# Altium PCB PCB.PcbDoc
Units mm, origin at the board's own origin, x right, y up, seen from the top; angles counter-clockwise.
Board outline 36 x 24 mm, 2 copper layers (Top, Bottom), stack 1.062 mm thick; 43 components, 32 nets, 168 pads, 73 vias.
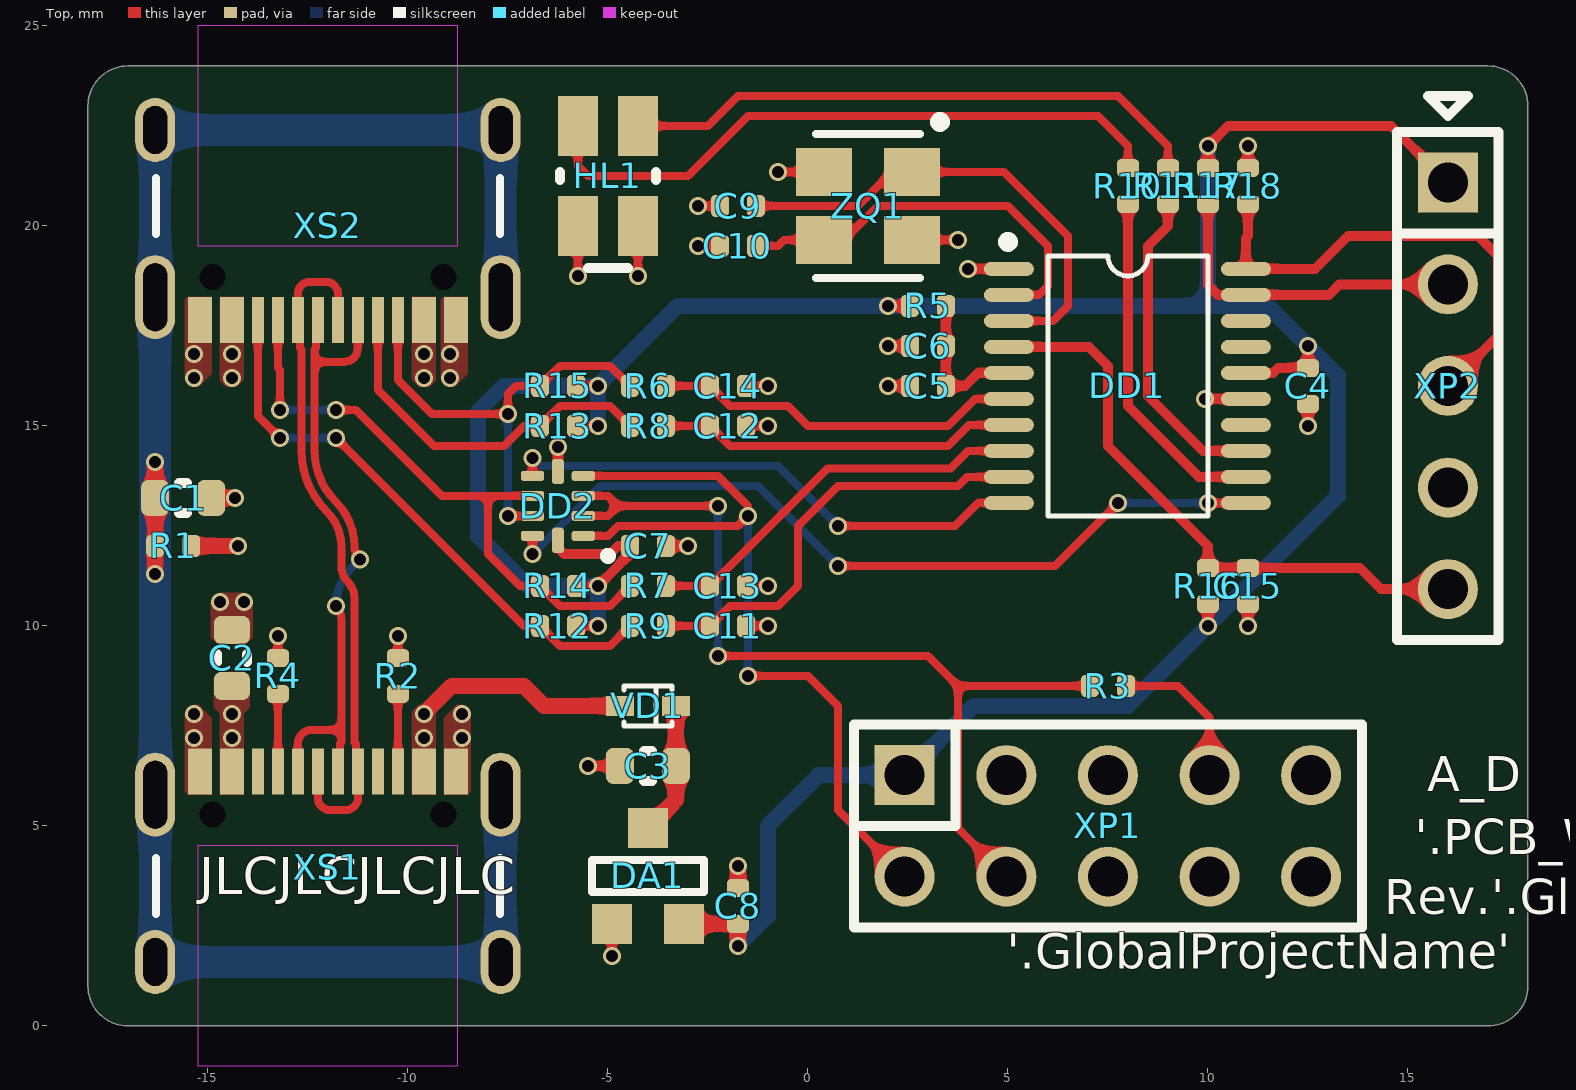
[diagram p0: Top view]
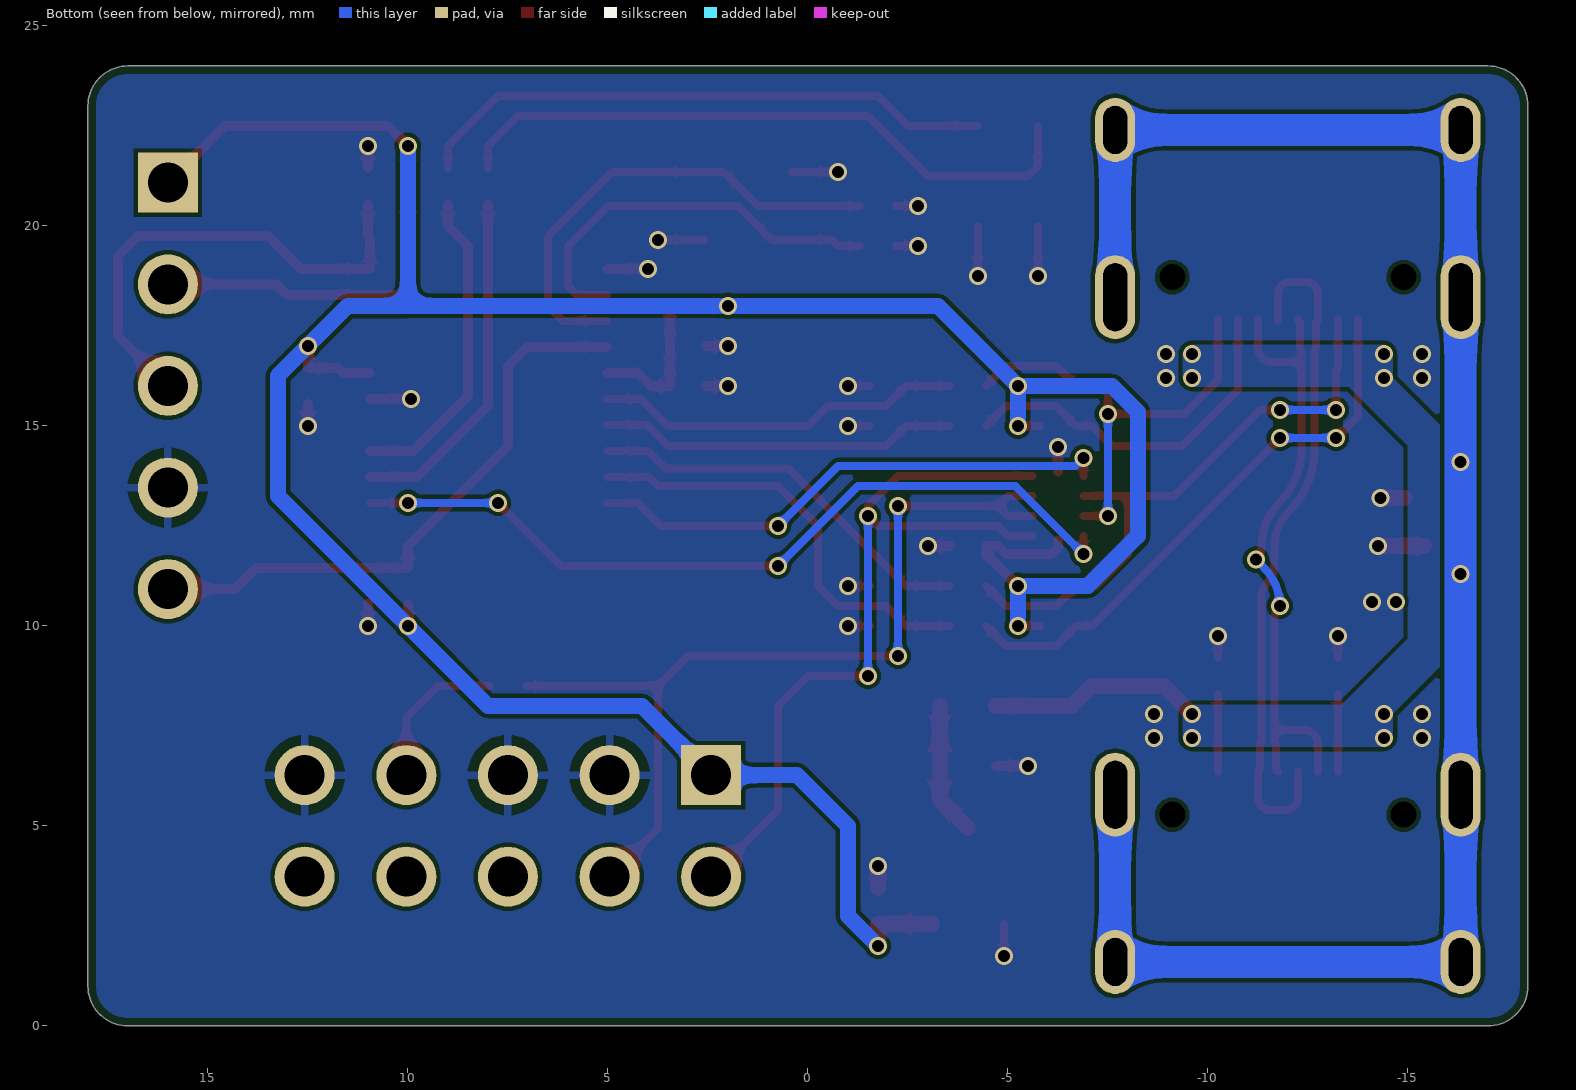
[diagram p1: Bottom view, seen from below]
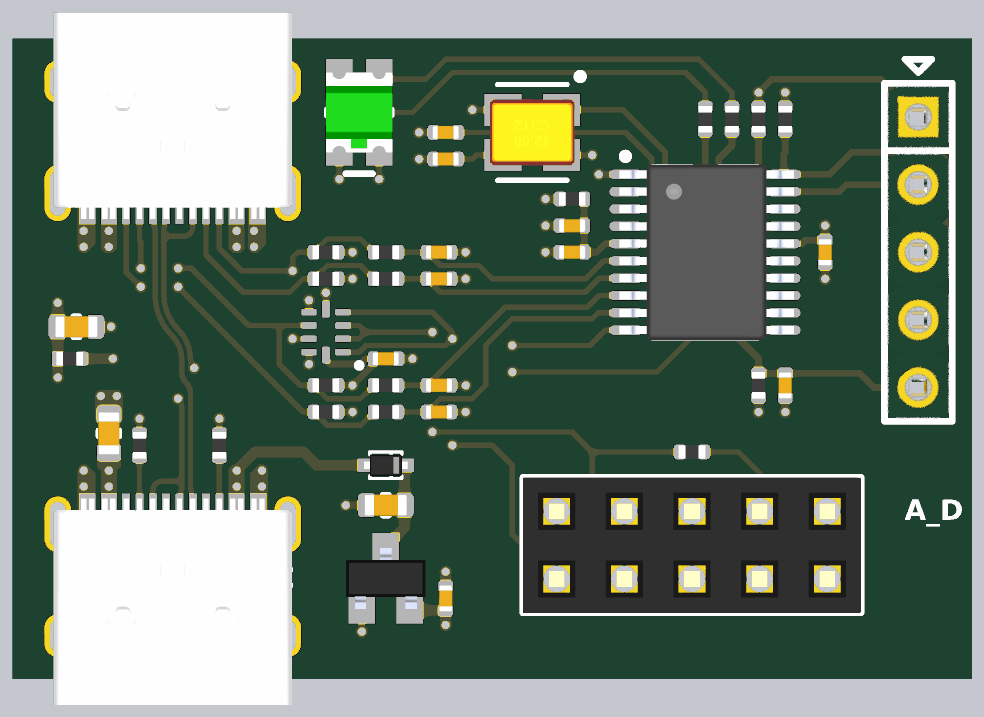
[diagram p2: 3D render of the assembled board from above, using the file's embedded part models]

## Layer stack, top to bottom
Top Solder: solder mask 0.0102, Solder Resist, Dk 3.5
Top: signal copper 0.0356
Core 1: core 0.9906, Core-042, Dk 4.6
Bottom: signal copper 0.0356
Bottom Solder: solder mask 0.0102, Solder Resist, Dk 3.5

## Board outline
-18,1 -18,23 cw(c-17,23) -17,24 17,24 cw(c17,23) 18,23 18,1 cw(c17,1) 17,0 -17,0 cw(c-17,1)

## Design rules (kind name [scope] priority, off if disabled: settings)
AssemblyTestPointUsage [All] p1 off:
AssemblyTestpoint [All] p1 off: testpointundercomponent=TRUE minsize=1.016 maxsize=2.54 preferedsize=1.524 minholesize=0 maxholesize=1.016 preferedholesize=0.813 testpointgrid=0.025 usegrid=TRUE gridtolerance=0 allowsidetop=TRUE allowsidebottom=TRUE
BoardOutlineClearance [All] p1: gap=0.2 ignorepadtopadclearanceinfootprint=FALSE
Clearance [All] p1: gap=0.1 ignorepadtopadclearanceinfootprint=FALSE
ComponentClearance [All] p1 off: gap=0.25 collisioncheckmode=3 verticalgap=0.25 showdistances=FALSE
DiffPairsRouting [All] p1: maxlimit=0.127 minlimit=0.127 mostfreqgap=0.127 toplayer_minwidth=0.2 toplayer_maxwidth=0.2 toplayer_prefwidth=0.2 bottomlayer_minwidth=0.2 bottomlayer_maxwidth=0.2 bottomlayer_prefwidth=0.2 impedanceprofiledriven=TRUE impedanceprofileid={B07E80A7-A74E-45DB-9064-49542DDC2D8E} impedanceprofilevalue=90.000000 maxuncoupledlength=12
FabricationTestPointUsage [All] p1 off: valid=0 allowmultiple=FALSE
FabricationTestpoint [All] p1 off: side=3 testpointundercomponent=TRUE minsize=1.016 maxsize=2.54 preferedsize=1.524 minholesize=0 maxholesize=1.016 preferedholesize=0.813 testpointgrid=0.025 allowsidetop=TRUE allowsidebottom=TRUE usegrid=TRUE gridtolerance=0
Height [All] p1: minheight=0 maxheight=25 prefheight=25
HoleSize [All] p1: absolutevalues=TRUE maxlimit=6 minlimit=0.2 maxpercent=80.000 minpercent=20.000
HoleToHoleClearance [All] p1: gap=0.25 allowstackedmicrovias=TRUE
MinimumSolderMaskSliver [All] p1 off: minsoldermaskwidth=0.254
PlaneClearance [All] p1: clearance=0.125
PlaneConnect [All] p1: planeconnectstyle=Direct reliefexpansion=0.4 reliefentries=4 reliefconductorwidth=0.3 reliefairgap=0.2
PolygonConnect PolygonConnect_DirectConnect [InComponentClass('DC')] p1: connectstyle=Direct reliefconductorwidth=0.254 reliefentries=4 polygonreliefangle="90 Angle" airgapwidth=0.254
PolygonConnect [All] p2: thpad.connectstyle=Relief thpad.reliefconductorwidth=0.2 thpad.reliefentries=4 thpad.polygonreliefangle="90 Angle" thpad.airgapwidth=0.25 smdpad.connectstyle=Relief smdpad.reliefconductorwidth=0.15 smdpad.reliefentries=4 smdpad.polygonreliefangle="90 Angle" smdpad.airgapwidth=0.15 via.connectstyle=Direct via.reliefconductorwidth=0.254 via.reliefentries=4 via.polygonreliefangle="90 Angle" via.airgapwidth=0.254
RoutingCorners [All] p1: cornerstyle=45-Degree minsetback=1.5 maxsetback=3.5
RoutingVias [All] p1: holewidth=0.2 width=0.4 viastyle="Through Hole" minholewidth=0.2 minwidth=0.4 maxholewidth=1 maxwidth=2
SMDEntry [All] p1: side=TRUE corner=TRUE anyangle=TRUE
SilkToSilkClearance [All] p1 off: silktosilkclearance=0.254
SilkToSolderMaskClearance [IsPad] p1 off: minsilkscreentomaskgap=0.254 clearancetoexposedcopper=TRUE
SolderMaskExpansion [All] p1: expansion=0.025 istentingtop=FALSE
Width [All] p1: maxlimit=8 minlimit=0.15 preferedwidth=0.6
Width Width_TrackEnds [All] p2 off: maxlimit=0.25 minlimit=0.25 preferedwidth=0.25 checkconnectedcopper=TRUE
15 further rules are at their usual default settings.

## Classes and differential pairs
component class DC: C1 C2 C3 C8 DA1 R1 VD1 XS1 XS2
differential pair USB_DD: +USB_DD_P -USB_DD_N

## Components (designator, comment, footprint, x,y, rotation, side; value= is the part's Value field where it differs from the comment)
C1 "Capacitor" C0603_160X080H080_H -15.62,13.2 r0 top value=0.1uF
C2 "Capacitor" C0603_160X080H080_H -14.4,9.2 r270 top value=0.1uF
C3 "Capacitor" C0603_160X080H080_H -4,6.5 r0 top value=1uF
C4 "Capacitor" C0402_100X050H050_H 12.5,16 r90 top value=4.7uF
C5 "Capacitor" C0402_100X050H050_H 3,16 r0 top value=1uF
C6 "Capacitor" C0402_100X050H050_H 3,17 r180 top value=0.01uF
C7 "Capacitor" C0402_100X050H050_H -4,12 r180 top value=0.1uF
C8 "Capacitor" C0402_100X050H050_H -1.75,3 r270 top value=4.7uF
C9 "Capacitor" C0402_100X050H050_H -1.75,20.5 r0 top value=12pF
C10 "Capacitor" C0402_100X050H050_H -1.75,19.5 r0 top value=12pF
C11 "Capacitor" C0402_100X050H050_H -2,10 r180 top value=100pF
C12 "Capacitor" C0402_100X050H050_H -2,15 r180 top value=100pF
C13 "Capacitor" C0402_100X050H050_H -2,11 r180 top value=100pF
C14 "Capacitor" C0402_100X050H050_H -2,16 r180 top value=100pF
C15 "Capacitor" C0402_100X050H050_H 11,11 r90 top value=0.1uF
DA1 "ME6203Axx-Series" SOT-23_190P290X160X145_N -4,3.75 r0 top value=ME6203A33M3G
DD1 "STM32F030FxPx-Series" TSSOP-20_065P650X440X120_N 8,16 r270 top value=STM32F030F4P6
DD2 "TS3USB221RSE" UQFN-10_050P200X150X060_N -6.25,13 r90 top value=TS3USB221RSER
HL1 "Text" LD3025 -5,21.25 r0 top value=XL-3227SURUGC
R1 "Resistor" R0402_100X050H035_H -15.87,12 r0 top value=100k
R2 "Resistor" R0402_100X050H035_H -10.25,8.75 r270 top value=5.1k
R3 "Resistor" R0402_100X050H035_H 7.5,8.5 r0 top value=0
R4 "Resistor" R0402_100X050H035_H -13.25,8.75 r270 top value=5.1k
R5 "Resistor" R0402_100X050H035_H 3,18 r180 top value=24.9
R6 "Resistor" R0402_100X050H035_H -4,16 r0 top value=10k
R7 "Resistor" R0402_100X050H035_H -4,11 r0 top value=10k
R8 "Resistor" R0402_100X050H035_H -4,15 r0 top value=10k
R9 "Resistor" R0402_100X050H035_H -4,10 r0 top value=10k
R10 "Resistor" R0402_100X050H035_H 8,21 r270 top value=1k
R11 "Resistor" R0402_100X050H035_H 9,21 r270 top value=1k
R12 "Resistor" R0402_100X050H035_H -6.25,10 r0 top value=47k
R13 "Resistor" R0402_100X050H035_H -6.25,15 r0 top value=47k
R14 "Resistor" R0402_100X050H035_H -6.25,11 r0 top value=200k
R15 "Resistor" R0402_100X050H035_H -6.25,16 r0 top value=200k
R16 "Resistor" R0402_100X050H035_H 10,11 r90 top value=10k
R17 "Resistor" R0402_100X050H035_H 10,21 r270 top value=10k
R18 "Resistor" R0402_100X050H035_H 11,21 r90 top value=10k
VD1 "Schottky" SOD-523 -4,8 r0 top value=MSK4005
XP1 "Debugger" PBD-10 7.5,5 r0 top value=PBD-10
XP2 "SWD" PLS-5 16,16 r270 top value=PLS-5
XS1 "Input" U262-161N-4BVC11 -12,-1 r0 top locked value=U262-161N-4BVC11
XS2 "Target" U262-161N-4BVC11 -12,25 r180 top locked value=U262-161N-4BVC11
ZQ1 "Crystal-1_3p_S" "SMD 3.2x2.5mm" 1.5,20.5 r180 top value=X322516MOB4SI

## Footprints (in the part's own frame and the unit in brackets; to place one, negate y for a bottom-side part, rotate by r counter-clockwise, add the part's x,y. Pads: shape width x height; smd on the part's side, far side on the other; paste and mask are expansions set on the pad)
C0402_100X050H050_H [mm] "Chip Capacitor, 2-Leads, Body 1,00x0,50mm, IPC High Density"
  rrect50% 0.45x0.55 smd: 1(-0.45,0) 2(0.45,0)
  body extent -0.5,-0.25 0.5,0.25, height 0.5
C0603_160X080H080_H [mm] "Chip Capacitor, 2-Leads, Body 1,60x0,80mm, IPC High Density"
  rrect50% 0.7x0.9 smd: 1(-0.7,0) 2(0.7,0)
  silkscreen extent -0.1,-0.38 0.1,0.38, body extent -0.8,-0.4 0.8,0.4, height 0.8
LD3025 [mm]
  rect 1x1.5 smd: 1(-0.75,1.25) 2(-0.75,-1.25) 3(0.75,1.25) 4(0.75,-1.25)
  silkscreen extent -1.2,-2.3 1.2,0.1, body extent -1.25,-1.5 1.25,1.5, height 1.21
PBD-10 [mm]
  rect 1.5x1.5 hole 1: 1(-5.08,1.27)
  round 1.5 hole 1: 2(-5.08,-1.27) 3(-2.54,1.27) 4(-2.54,-1.27) 5(0,1.27) 6(0,-1.27) 7(2.54,1.27) 8(2.54,-1.27) 9(5.08,1.27) 10(5.08,-1.27)
  silkscreen extent -6.35,-2.54 6.35,2.54, body extent -6.35,-2.54 6.35,2.54, height 8.6
PLS-5 [mm]
  rect 1.5x1.5 hole 1: 1(-5.08,0)
  round 1.5 hole 1: 2(-2.54,0) 3(0,0) 4(2.54,0) 5(5.08,0)
  silkscreen extent -6.35,-1.27 6.35,1.27, body extent -6.35,-1.27 6.35,1.27, height 8.9
R0402_100X050H035_H [mm] "Chip Resistor, 2-Leads, Body 1,00x0,50mm, IPC High Density"
  rrect50% 0.45x0.55 smd: 1(-0.45,0) 2(0.45,0)
  body extent -0.5,-0.25 0.5,0.25, height 0.35
"SMD 3.2x2.5mm" [mm]
  rect 1.4x1.2 smd paste+0: 1(-1.1,-0.85) 2(1.1,-0.85) 3(1.1,0.85) 4(-1.1,0.85)
  silkscreen extent -1.92,-2.22 1.3,1.8, body extent -1.6,-1.25 1.6,1.25, height 0.77
SOD-523 [mm]
  rect 0.7x0.5 smd: 1(-0.7,0) 2(0.7,0)
  silkscreen extent -0.6,-0.5 0.6,0.5, body extent -0.82,-0.4 0.83,0.4, height 0.67
SOT-23_190P290X160X145_N [mm] "КТ-46"
  rect 1x1 smd: 1(-0.9,-1.2) 2(0.9,-1.2) 3(0,1.2)
  silkscreen extent -1.4,-0.4 1.4,0.4, body extent -1.5,-1.15 1.5,1.15, height 1.11
TSSOP-20_065P650X440X120_N [mm]
  oval 0.35x1.25 smd: 1(-2.925,-2.975) 2(-2.275,-2.975) 3(-1.625,-2.975) 4(-0.975,-2.975) 5(-0.325,-2.975) 6(0.325,-2.975) 7(0.975,-2.975) 8(1.625,-2.975) 9(2.275,-2.975) 10(2.925,-2.975) 11(2.925,2.95) 12(2.275,2.95) 13(1.625,2.95) 14(0.975,2.95) 15(0.325,2.95) 16(-0.325,2.95) 17(-0.975,2.95) 18(-1.625,2.95) 19(-2.275,2.95) 20(-2.925,2.95)
  silkscreen extent -3.72,-3.12 3.25,2, body extent -3.3,-3.22 3.3,3.33, height 1.2
U262-161N-4BVC11 [mm]
  round 0 hole 0.65 unplated: 0(-2.89,6.28) 0(2.89,6.28)
  rect 0.3x1.15 smd: A1(-3.35,7.355) A4(-2.55,7.355) A5(-1.25,7.355) A6(-0.25,7.355) A7(0.25,7.355) A8(-1.75,7.355) A9(2.55,7.355) A12(3.35,7.355) B1(3.05,7.355) B4(2.25,7.355) B5(1.75,7.355) B6(0.75,7.355) B7(-0.75,7.355) B8(1.25,7.355) B9(-2.25,7.355) B12(-3.05,7.355)
  oval 1x1.6 hole 0.6 slot 1.2 at 90 deg: SH(-4.32,2.6) SH(4.32,2.6)
  oval 1x2.1 hole 0.6 slot 1.7 at 90 deg: SH(-4.32,6.78) SH(4.32,6.78)
  Top keep-out region: -3.25,0 3.25,0 3.25,5.5 -3.25,5.5
  silkscreen extent -4.3,3.8 4.3,5.2, body extent -4.48,0 4.48,7.75, height 3.26
UQFN-10_050P200X150X060_N [mm]
  rrect50% 0.25x0.58 smd: 1(-0.75,-0.635) 2(-0.25,-0.635) 3(0.25,-0.635) 4(0.75,-0.635) 6(0.75,0.635) 7(0.25,0.635) 8(-0.25,0.635) 9(-0.75,0.635)
  rrect50% 0.63x0.3 smd: 5(0.86,0) 10(-0.86,0)
  silkscreen extent -1.35,-1.35 -1.15,-1.15, body extent -1,-0.75 1,0.75, height 0.6

## Part data
C1 C2: library part GRM188R72A104KA35D, Dielectric Type=X7R, LCSC Part=C113803, Manufacturer=Murata, Schematic Value="0.1uF, 100V", Temperature Max=+125°С, Temperature Min=-55°С, Tolerance=±10%, Voltage=100V, AEC Standard=General, ClassName=DC, Functional Analog=GRM188R72A104KA35J, ID=232, Part Number=GRM188R72A104KA35D, Part Type=Конденсатор
C3: library part GCM188R71E105KA64D, Dielectric Type=X7R, LCSC Part=C85862, Manufacturer=Murata, Schematic Value="1uF, 25V", Temperature Max=+125°С, Temperature Min=-55°С, Tolerance=±10%, Voltage=25V, AEC Standard=AEC-Q200, ClassName=DC, Functional Analog=GCM188R71E105KA64J, ID=134, Part Number=GCM188R71E105KA64D, Part Type=Конденсатор
C4 C8: library part GRM155R61A475MEAAD, Dielectric Type=X5R, LCSC Part=C335105, Manufacturer=Murata, Schematic Value="4.7uF, 10V", Temperature Max=+85°С, Temperature Min=-55°С, Tolerance=±20%, Voltage=10V, AEC Standard=General, Functional Analog=GRM155R61A475MEAAJ, ID=255, Part Number=GRM155R61A475MEAAD, Part Type=Конденсатор
  C8: ClassName=DC
C5: library part GRM155C71A105KE11D, Dielectric Type=X7S, LCSC Part=C437522, Manufacturer=Murata, Schematic Value="1uF, 10V", Temperature Max=+125°С, Temperature Min=-55°С, Tolerance=±10%, Voltage=10V, AEC Standard=General, Functional Analog=GRM155C71A105KE11J, ID=179, Part Number=GRM155C71A105KE11D, Part Type=Конденсатор
C6: library part GCM155R71E103KA37D, Dielectric Type=X7R, LCSC Part=C126526, Manufacturer=Murata, Schematic Value="0.01uF, 25V", Temperature Max=+125°С, Temperature Min=-55°С, Tolerance=±10%, Voltage=25V, AEC Standard=AEC-Q200, Functional Analog="GRM155R71E103KA01D, GCM155R71E103KA37J, GCM155R71E103KA37W", ID=150, Part Number=GCM155R71E103KA37D, Part Type=Конденсатор
C7 C15: library part GCM155R71C104KA55D, Dielectric Type=X7R, LCSC Part=C85857, Manufacturer=Murata, Schematic Value="0.1uF, 16V", Temperature Max=+125°С, Temperature Min=-55°С, Tolerance=±10%, Voltage=16V, AEC Standard=AEC-Q200, Functional Analog="GRM155R71C104KA88D, GCM155R71C104KA55J, GCM155R71C104KA55W", ID=163, Part Number=GCM155R71C104KA55D, Part Type=Конденсатор
C9 C10: library part GRM1555C1H120JA01D, Dielectric Type=NP0, LCSC Part=C76948, Manufacturer=Murata, Schematic Value="12pF, 50V", Temperature Max=+125°С, Temperature Min=-55°С, Tolerance=±5%, Voltage=50V, AEC Standard=General, Functional Analog="GJM1555C1H120GB01D, GRM1555C1H120JA01J, GRM1555C1H120JA01W", ID=159, Part Number=GRM1555C1H120JA01D, Part Type=Конденсатор
C11 C12 C13 C14: library part GCM1555C1H101FA16D, Dielectric Type=NP0, LCSC Part=C2941926, Manufacturer=Murata, Schematic Value="100pF, 50V", Temperature Max=+125°С, Temperature Min=-55°С, Tolerance=±1%, Voltage=50V, AEC Standard=AEC-Q200, Functional Analog="GRM1555C1H101JA01D, GCM1555C1H101FA16J, GCM1555C1H101FA16W", ID=164, Part Number=GCM1555C1H101FA16D, Part Type=Конденсатор
DA1: library part ME6203A33M3G, Input Voltage=+3.0…40.0V, LCSC Part=C87842, Manufacturer="Nanjing Micro One Elec", Output Current=0.1A, Output Voltage=+3.3V, Temperature Max=+150°С, Temperature Min=-45°С, Total Power Dissipation=0.3W, ClassName=DC, Functional Analog=HT7533S, ID=45, Part Number=ME6203A33M3G, Part Type=Микросхема, Schematic Value=ME6203A33M3G
DD1: library part STM32F030F4P6, LCSC Part=C32908, Manufacturer=STMicroelectronics, Operation Frequency=48MHz, Temperature Max=+85°С, Temperature Min=-40°С, ID=46, IO Lines=15, Part Number=STM32F030F4P6, Part Type=Микросхема, Prog Interface=SWD, RAM=4K, ROM=16K, Schematic Value=STM32F030F4P6, Supply Operation=+2.4…3.6V
DD2: library part TS3USB221RSER, LCSC Part=C130085, Manufacturer="Texas Instruments", Supply Current=30uA, Temperature Max=+85°C, Temperature Min=-40°C, Channels=1, ID=20, Input Interface=LVDS, OTG Support=No, Part Number=TS3USB221RSER, Part Type=Микросхема, Schematic Value=TS3USB221RSER, Supply Operation=+2.3…3.6V, USB Speed Support="480 Mb/s", USB Type Support="USB 2.0"
HL1: library part XL-3227SURUGC, Color="Red, Green", Forward Current=30mA, Forward Voltage=2.5/2.5V, LCSC Part=C965842, Manufacturer=XINGLIGHT, Power Dissipation=75/75mW, Temperature Max=+85°С, Temperature Min=-30°С, ID=46, Leds=2, Part Number=XL-3227SURUGC, Part Type="Светодиодная сборка", Published=04.02.2017, Publisher="Andrew Danich", Schematic Value=XL-3227SURUGC, Type="Сборка индикаторная"
R1: library part 0402WGF1003TCE, LCSC Part=C25741, Limit Voltage=50V, Manufacturer="Uniroyal Elec", Schematic Value="100k ±1%", Temperature Coefficient=100ppm, Temperature Max=+155°С, Temperature Min=-55°С, Tolerance=±1%, Total Power Dissipation=0.1W, ClassName=DC, ID=661, Part Number=0402WGF1003TCE, Part Type=Резистор, Series Type=Thick-Film
R2 R4: library part 0402WGF5101TCE, LCSC Part=C25905, Limit Voltage=50V, Manufacturer="Uniroyal Elec", Schematic Value="5.1k ±1%", Temperature Coefficient=100ppm, Temperature Max=+155°С, Temperature Min=-55°С, Tolerance=±1%, Total Power Dissipation=0.1W, ID=667, Part Number=0402WGF5101TCE, Part Type=Резистор, Series Type=Thick-Film
R3: library part RC0402JR-070RL, Limit Voltage=50V, Manufacturer=Yageo, Schematic Value="0 ±5%", Temperature Coefficient=100ppm, Temperature Max=+155°С, Temperature Min=-55°С, Tolerance=±5%, Total Power Dissipation=0.1W, ID=362, Part Number=RC0402JR-070RL, Part Type=Резистор, Series Type=Thick-Film
R5: library part RC0402FR-0724R9L, Limit Voltage=50V, Manufacturer=Yageo, Schematic Value="24.9 ±1%", Temperature Coefficient=100ppm, Temperature Max=+155°С, Temperature Min=-55°С, Tolerance=±1%, Total Power Dissipation=0.1W, ID=543, Part Number=RC0402FR-0724R9L, Part Type=Резистор, Series Type=Thick-Film
R6 R7 R8 R9 R16 R17 R18: library part 0402WGF1002TCE, LCSC Part=C25744, Limit Voltage=50V, Manufacturer="Uniroyal Elec", Schematic Value="10k ±1%", Temperature Coefficient=100ppm, Temperature Max=+155°С, Temperature Min=-55°С, Tolerance=±1%, Total Power Dissipation=0.1W, ID=665, Part Number=0402WGF1002TCE, Part Type=Резистор, Series Type=Thick-Film
R10 R11: library part 0402WGF1001TCE, LCSC Part=C11702, Limit Voltage=50V, Manufacturer="Uniroyal Elec", Schematic Value="1k ±1%", Temperature Coefficient=100ppm, Temperature Max=+155°С, Temperature Min=-55°С, Tolerance=±1%, Total Power Dissipation=0.1W, ID=663, Part Number=0402WGF1001TCE, Part Type=Резистор, Series Type=Thick-Film
R12 R13: library part 0402WGF4702TCE, LCSC Part=C25792, Limit Voltage=50V, Manufacturer="Uniroyal Elec", Schematic Value="47k ±1%", Temperature Coefficient=100ppm, Temperature Max=+155°С, Temperature Min=-55°С, Tolerance=±1%, Total Power Dissipation=0.1W, ID=668, Part Number=0402WGF4702TCE, Part Type=Резистор, Series Type=Thick-Film
R14 R15: library part 0402WGF2003TCE, LCSC Part=C25764, Limit Voltage=50V, Manufacturer="Uniroyal Elec", Schematic Value="200k ±1%", Temperature Coefficient=100ppm, Temperature Max=+155°С, Temperature Min=-55°С, Tolerance=±1%, Total Power Dissipation=0.1W, ID=676, Part Number=0402WGF2003TCE, Part Type=Резистор, Series Type=Thick-Film
VD1: library part MSK4005, Forward Current=500mA, Forward Voltage=0.49V, LCSC Part=C345957, Manufacturer=Shikues, Reverse Current=150uA, Reverse Voltage=50V, Temperature Max=+125°С, Temperature Min=-55°С, ClassName=DC, ID=26, Part Number=MSK4005, Schematic Value=MSK4005
XP1: library part PBD-10, Limit Current=3A, Limit Voltage=250V, Resistance=15momh, Connector Type=Female, ID=20, Part Number=PBD-10, Pins=10, Pitch=2.54mm, Schematic Value=PBD-10, Surface Finish=Gold
XP2: library part PLS-5, Limit Current=3A, Limit Voltage=250V, Resistance=15momh, Connector Type=Male, ID=4, Part Number=PLS-5, Pins=5, Pitch=2.54mm, Schematic Value=PLS-5, Surface Finish=Gold
XS1 XS2: library part U262-161N-4BVC11, LCSC Part=C319148, Limit Current=3A, Limit Voltage=30V, Manufacturer="XKB Enterprise", Temperature Max=+85°С, Temperature Min=-40°С, ClassName=DC, Connector Type=Female, ID=41, Interface="USB 3.1 Type C", Max Data Rate="5 Gbps", Mount Type=Surface, Part Number=U262-161N-4BVC11, Part Type=Розетка, Pins=16, Schematic Value=U262-161N-4BVC11
ZQ1: library part X322516MOB4SI, LCSC Part=C12668, Load Capacitance=12pF, Manufacturer="Yangxing Tech", Output Frequency=16МГц, Schematic Value="16МГц ±10ppm", Shunt Capacitance=7pF, Temperature Coefficient=±10ppm, Temperature Max=+85°С, Temperature Min=-40°С, ID=39, Part Number=X322516MOB4SI, Part Type="Кварцевый резонатор"

## Via types
v1: diameter 0.45, hole 0.3, Top to Bottom, tented both sides, 73 vias

## Nets (pads, with @x,y where several pads share a name; then routed paths per layer and width w, separated by ;. In a path a pad name is that pad's centre, name@x,y a point inside that pad or via, vN(x,y) a via of type N, cw(c..) or ccw(c..) an arc to the next point about the centre after c; other vN are vias at no path point)
ADC_CC1: C12.2 DD1.7 R8.2 | length 9
  Top w0.2: R8.2 C12.2 -1.95,14.5 3.5,14.5 4.025,15.025 DD1.7
ADC_CC2: C11.2 DD1.9 R9.2 | length 11
  Top w0.2: R9.2 C11.2 -1.95,10.5 -0.75,10.5 -0.25,11 -0.25,12.5 0.75,13.5 3.75,13.5 3.975,13.725 DD1.9
ADC_SBU1: C14.2 DD1.6 R6.2 | length 9.3
  Top w0.2: R6.2 C14.2 -1.95,15.5 -0.5,15.5 0,15 3.5,15 4.175,15.675 DD1.6
ADC_SBU2: C13.2 DD1.8 R7.2 | length 10
  Top w0.2: R7.2 C13.2 0.487,13.938 3.562,13.938 4,14.375 DD1.8
AVCC3P3: C5.2 C6.1 DD1.5 R5.1 | length 3.7
  Top w0.25: R5.1 C6.1 C5.2 3.925,16 4.25,16.325 DD1.5
CC1: R8.1 R13.1 XS2.A5 | length 9.2
  Top w0.2: XS2.A5 -10.75,15.9 -9.35,14.5 -7.6,14.5 -7.1,15 R13.1 -6.2,15.5 -4.95,15.5 R8.1
CC2: R9.1 R12.1 XS2.B5 | length 14.3
  Top w0.2: XS2.B5 -13.75,15.25 v1(-13.2,14.7) ; v1(-11.8,14.7) -7.1,10 R12.1 -6.2,9.5 -4.95,9.5 R9.1
  Bottom w0.2: v1(-13.2,14.7) v1(-11.8,14.7)
GND: C1.2 C2.1 C3.1 C4.1 C5.1 C6.2 C7.1 C8.1 C9.1 C10.1 C11.1 C12.1 C13.1 C14.1 C15.1 DA1.1 DD1.1 DD1.15 DD2.5 HL1.2 HL1.4 R1.2 R2.1 R4.1 R18.2 XP1.3 XP1.5 XP1.9 XP2.4 XS1.A1 XS1.A12 XS1.B1 XS1.B12 XS2.A1 XS2.A12 XS2.B1 XS2.B12 ZQ1.2 ZQ1.4 | length 19.1
  Top w0.2: R4.1 v1(-13.25,9.75) ; R2.1 v1(-10.25,9.75) ; v1(-5.75,18.75) HL1.2 ; v1(-4.9,1.75) DA1.1 ; v1(-4.25,18.75) HL1.4 ; v1(-2.75,19.5) C10.1 ; v1(-2.75,20.5) C9.1 ; C11.1 v1(-1,10) ; C13.1 v1(-1,11) ; C12.1 v1(-1,15) ; C14.1 v1(-1,16) ; v1(-0.75,21.35) ZQ1.2 ; ZQ1.4 v1(3.75,19.65)
  Top w0.25: DD2.5 v1(-6.25,14.475) ; v1(-5.5,6.5) C3.1 ; C7.1 v1(-3,12) ; v1(2,16) C5.1 ; v1(2,17) C6.2 ; v1(4,18.925) DD1.1 ; v1(9.925,15.675) DD1.15 ; v1(11,10) C15.1 ; R18.2 v1(11,22) ; v1(12.5,15) C4.1
  Top w0.4: R1.2 v1(-14.25,12) ; C1.2 v1(-14.32,13.2) ; C8.1 v1(-1.75,4)
  other v1: -15.35,7.2 -8.65,7.2 -15.35,7.8 -8.65,7.8 -14.7,10.6 -14.1,10.6 -15.35,16.2 -8.95,16.2 -15.35,16.8 -8.95,16.8
LED_G: DD1.13 R11.2 | length 8
  Top w0.25: R11.2 9,20 8.5,19.5 8.5,15.75 9.875,14.375 DD1.13
LED_R: DD1.12 R10.2 | length 8.7
  Top w0.25: R10.2 8,15.5 9.775,13.725 DD1.12
NetC3_2: C3.2 DA1.3 VD1.2 | length 3.3
  Top w0.4: DA1.3 -3.3,5.65 C3.2 VD1.2
NetC9_2: C9.2 DD1.3 ZQ1.1 | length 12.2
  Top w0.2: C9.2 1.25,20.5 2.1,21.35 ZQ1.1 4.9,21.35 6.5,19.75 6.5,18 6.125,17.625 DD1.3
NetC10_2: C10.2 DD1.2 ZQ1.3 | length 10.2
  Top w0.2: C10.2 -0.75,19.5 -0.6,19.65 ZQ1.3 0.9,19.65 1.75,20.5 5,20.5 6,19.5 6,18.5 5.775,18.275 DD1.2
NetHL1_1: HL1.1 R10.1 | length 16.3
  Top w0.2: HL1.1 -5.75,21.5 -5.5,21.25 -3,21.25 -1.5,22.75 7.25,22.75 8,22 R10.1
NetHL1_3: HL1.3 R11.1 | length 14.6
  Top w0.2: HL1.3 -2.5,22.5 -1.75,23.25 7.75,23.25 9,22 R11.1
NetR2_2: R2.2 XS1.B5 | length 1.9
  Top w0.2: XS1.B5 R2.2
NetR3_2: R3.2 XP1.7 | length 3.9
  Top w0.2: R3.2 9.25,8.5 10.04,7.71 XP1.7
NetR4_2: R4.2 XS1.A5 | length 1.9
  Top w0.2: XS1.A5 R4.2
PROBE_SWD_CLK: DD2.2 DD2.3 R3.1 XP1.4 | length 23.1
  Top w0.2: DD2.2 -5,12.75 -4.75,13 ; DD2.3 -5,13.25 -4.75,13 ; v1(-2.25,9.25) 3,9.25 3.75,8.5 ; v1(-2.25,13) -4.75,13 ; XP1.4 3.75,4.94 3.75,8.5 ; R3.1 3.75,8.5
  Bottom w0.2: v1(-2.25,9.25) v1(-2.25,13)
PROBE_SWD_IO: DD2.1 DD2.4 XP1.2 | length 20.5
  Top w0.2: DD2.1 -5,12.25 -4.75,12.5 -1.75,12.5 v1(-1.5,12.75) -1.5,13 -2.25,13.75 DD2.4 ; v1(-1.5,8.75) 0,8.75 0.75,8 0.75,5.4 XP1.2
  Bottom w0.2: v1(-1.5,8.75) v1(-1.5,12.75)
RESET_N: C15.2 DD1.4 R16.2 XP2.5 | length 15
  Top w0.25: DD1.4 7.025,16.975 7.5,16.5 7.5,14.5 10,12 R16.2 C15.2 13.8,11.45 14.33,10.92 XP2.5
SBU1: DD2.8 R6.1 R15.1 XS2.A8 | length 11.8
  Top w0.2: XS2.A8 -10.25,16.15 -9.4,15.3 v1(-7.5,15.3) -7.5,15.8 -7.3,16 R15.1 -6.2,16.5 -4.95,16.5 R6.1 ; v1(-7.5,12.75) DD2.8
  Bottom w0.2: v1(-7.5,12.75) v1(-7.5,15.3)
SBU2: DD2.7 R7.1 R14.1 XS2.B8 | length 15.2
  Top w0.2: XS2.B8 -13.25,16.45 -13.2,16.4 v1(-13.2,15.4) ; v1(-11.8,15.4) -11.3,15.4 -9.15,13.25 -8,13.25 ; DD2.7 -8,13.25 ; R7.1 -4.95,10.5 -6.2,10.5 R14.1 -7.2,11 -8,11.8 -8,13.25
  Bottom w0.2: v1(-13.2,15.4) v1(-11.8,15.4)
SH: C1.1 R1.1 XS1.SH XS2.SH | length 49.2
  Top w0.4: v1(-16.32,11.3) R1.1 C1.1 v1(-16.32,14.1)
  Bottom w0.8: XS1.SH@-7.68,5.78 -7.68,1.6 -16.32,1.6 -16.32,5.78 v1(-16.32,11.3) v1(-16.32,14.1) -16.32,17.93 -16.32,18.22 -16.32,22.4 -7.68,22.4 XS2.SH@-7.68,18.22
SWD_CLK: DD1.20 R18.1 XP2.3 | length 12.3
  Top w0.25: R18.1 11,19.75 10.95,19.7 DD1.20 12.675,18.925 13.5,19.75 16.75,19.75 17.25,19.25 17.25,17.25 XP2.3
SWD_EN_N: DD1.10 DD2.6 | length 13.3
  Top w0.2: DD2.6 v1(-6.885,14.2) ; v1(0.75,12.5) 3.675,12.5 4.25,13.075 DD1.10
  Bottom w0.2: v1(-6.885,14.2) -6.685,14 -0.75,14 v1(0.75,12.5)
SWD_IO: DD1.19 R17.2 XP2.2 | length 8.2
  Top w0.25: R17.2 10,18.525 10.25,18.275 DD1.19 13.025,18.275 13.29,18.54 XP2.2
SWD_SEL: DD1.11 DD2.9 | length 20.5
  Top w0.2: v1(-6.885,11.8) DD2.9 ; v1(0.75,11.5) 6.175,11.5 v1(7.75,13.075) ; v1(10,13.075) DD1.11
  Bottom w0.2: v1(-6.885,11.8) -5.185,13.5 -1.25,13.5 v1(0.75,11.5) ; v1(7.75,13.075) v1(10,13.075)
USB_DD_N: XS1.A7 XS1.B7 XS2.A7 XS2.B7 | length 15.8
  Top w0.2: XS1.B7 -12.75,7.05 cw(c-12.4,7.05) -12.4,7.4 -11.663,7.4 ; XS2.A7 ccw(c-12.129,17.524) -12.3,17.524 -12.3,16.972 cw(c-12.362,16.972) -12.318,16.927 ccw(c-12.274,16.883) -12.337,16.883 -12.337,16.6 ; v1(-11.8,10.5) cw(c-12.13,10.17) -11.663,10.17 -11.663,7.4 ; XS1.A7 ccw(c-11.871,6.476) -11.7,6.476 -11.7,7.028 cw(c-11.638,7.028) -11.682,7.073 ccw(c-11.726,7.117) -11.663,7.117 -11.663,7.4 ; XS2.B7 -11.25,16.95 cw(c-11.6,16.95) -11.6,16.6 -12.337,16.6 ; v1(-11.2,11.655) cw(c-10.87,11.984) -11.336,11.984 ccw(c-12.911,11.984) -11.798,13.098 -11.8,13.1 cw(c-10.505,14.395) -12.337,14.395 -12.337,16.6
  Bottom w0.2: v1(-11.8,10.5) cw(c-10.461,10.5) -11.408,11.447 v1(-11.2,11.655)
USB_DD_P: XS1.A6 XS1.B6 XS2.A6 XS2.B6 | length 17
  Top w0.2: XS1.A6 -12.25,5.7 ccw(c-11.95,5.7) -11.95,5.4 -11.55,5.4 ccw(c-11.55,5.7) -11.25,5.7 XS1.B6 cw(c-11.129,6.476) -11.3,6.476 -11.3,7.028 ccw(c-11.362,7.028) -11.318,7.073 cw(c-11.274,7.117) -11.337,7.117 -11.337,10.705 ccw(c-11.895,10.705) -11.5,11.1 cw(c-11.105,11.495) -11.663,11.495 -11.663,11.981 ccw(c-12.919,11.981) -12.031,12.869 -12.033,12.87 cw(c-10.51,14.393) -12.664,14.393 -12.664,16.883 ccw(c-12.726,16.883) -12.682,16.927 cw(c-12.638,16.972) -12.7,16.972 -12.7,17.524 ccw(c-12.871,17.524) XS2.B6 -12.75,18.3 cw(c-12.45,18.3) -12.45,18.6 -12.05,18.6 cw(c-12.05,18.3) -11.75,18.3 XS2.A6
VBUS: C2.2 VD1.1 XS1.A4 XS1.A9 XS1.B4 XS1.B9 XS2.A4 XS2.A9 XS2.B4 XS2.B9 | length 5.4
  Top w0.4: v1(-9.6,7.8) -8.9,8.5 -7.1,8.5 -6.6,8 VD1.1
  other v1: -14.4,7.2 -9.6,7.2 -14.4,7.8 -14.4,16.2 -9.6,16.2 -14.4,16.8 -9.6,16.8
VCC3P3: C4.2 C7.2 C8.2 DA1.2 DD1.16 DD2.10 R5.2 R12.2 R13.2 R14.2 R15.2 R16.1 R17.1 XP1.1 XP2.1 | length 78.1
  Top w0.2: R12.2 v1(-5.25,10) ; R14.2 v1(-5.25,11) ; R13.2 v1(-5.25,15) ; R15.2 v1(-5.25,16)
  Top w0.25: DD2.10 -6.25,11.95 -6.1,11.8 -4.95,11.8 -4.75,12 C7.2 -4.45,11.8 v1(-5.25,11) ; v1(2,18) R5.2 ; v1(10,10) R16.1 ; R17.1 v1(10,22) 10.5,22.5 14.58,22.5 XP2.1 ; DD1.16 11.625,16.325 11.75,16.45 C4.2 v1(12.5,17)
  Top w0.4: DA1.2 C8.2 v1(-1.75,2)
  Bottom w0.4: v1(-5.25,10) v1(-5.25,11) -7,11 -8.25,12.25 -8.25,15.35 -7.6,16 v1(-5.25,16) ; v1(-5.25,15) v1(-5.25,16) ; v1(-1.75,2) -1,2.75 -1,5 0.27,6.27 XP1.1 4.15,8 8,8 v1(10,10) 13.25,13.25 13.25,16.25 v1(12.5,17) 11.5,18 10,18 ; v1(10,22) 10,18 ; v1(-5.25,16) -3.25,18 v1(2,18) 10,18
pads on no net: DD1.14 DD1.17 DD1.18 XP1.6 XP1.8 XP1.10 XS1.0 XS1.A8 XS1.B8 XS2.0

## Polygon pours and split planes (outlines as drawn)
VBUS on Bottom "NONET_L-01_P-001" (solid, remove dead copper, pour order 0): -9.6,17.025 -9.375,16.8 -9.375,16.2 -9.6,15.975 -13.525,15.975 -15,14.5 -15,9.675 -13.35,8.025 -9.6,8.025 -9.375,7.8 -9.375,7.2 -9.6,6.975 -14.4,6.975 -14.625,7.2 -14.625,7.8 -15.8,8.975 -15.8,15.025 -14.625,16.2 -14.625,16.8 -14.4,17.025
GND on Bottom "NONET_L-01_P-001" (solid, remove dead copper, pour order 11): -18,24 18,24 18,0 -18,0
GND on Top "NONET_L-01_P-001" (solid, remove dead copper, pour order 10): -8.5,18.225 -8.5,16.3 -8.825,15.975 -8.95,15.975 -9.175,16.2 -9.175,18.15 -9.1,18.225
VBUS on Top "NONET_L-01_P-001" (solid, remove dead copper, pour order 9): -9.9,18.225 -9.3,18.225 -9.3,16.125 -9.45,15.975 -9.725,15.975 -9.9,16.15
VBUS on Top "NONET_L-01_P-001" (solid, remove dead copper, pour order 7): -14.1,18.225 -14.7,18.225 -14.7,16.125 -14.55,15.975 -14.275,15.975 -14.1,16.15
GND on Top "NONET_L-01_P-001" (solid, remove dead copper, pour order 6): -14.9,18.225 -14.9,16.3 -15.225,15.975 -15.35,15.975 -15.575,16.2 -15.575,18.15 -15.5,18.225
VBUS on Top "NONET_L-01_P-001" (solid, remove dead copper, pour order 5): -9.9,5.775 -9.3,5.775 -9.3,7.875 -9.45,8.025 -9.725,8.025 -9.9,7.85
GND on Top "NONET_L-01_P-001" (solid, remove dead copper, pour order 4): -9.1,5.775 -9.1,7.7 -8.775,8.025 -8.65,8.025 -8.425,7.8 -8.425,5.85 -8.5,5.775
GND on Top "NONET_L-01_P-001" (solid, remove dead copper, pour order 3): -14.775,9.55 -14.925,9.7 -14.925,10.6 -14.7,10.825 -14.1,10.825 -13.875,10.6 -13.875,9.7 -14.025,9.55
VBUS on Top "NONET_L-01_P-001" (solid, remove dead copper, pour order 2): -14.7,5.775 -14.1,5.775 -14.1,7.8 -13.95,7.95 -13.95,8.7 -14.1,8.85 -14.675,8.85 -14.85,8.675 -14.85,7.95 -14.7,7.8
GND on Top "NONET_L-01_P-001" (solid, remove dead copper, pour order 1): -14.9,5.775 -14.9,7.7 -15.225,8.025 -15.35,8.025 -15.575,7.8 -15.575,5.85 -15.5,5.775

## Silkscreen, mask and mechanical layers (free items; w line width, h text height)
Top Overlay:
  lines w0.25: 15.5,23.25 16,22.75 16.5,23.25 15.5,23.25
  text "A_D" at 15.482,5.575 h1.5
  text "'.PCB_Week'" at 15.175,4.007 h1.5
  text "JLCJLCJLCJLC" at -15.215,2.974 h1.6
  text "Rev.'.GlobalProjectRevision'" at 14.403,2.507 h1.5
  text "'.GlobalProjectName'" at 4.967,1.143 h1.5
1 - Board Outline:
  the board outline again, w0.2